# Altium PCB PDB_Layout_2oz_v1.0.PcbDoc
Units mil, origin at the board's own origin, x right, y up, seen from the top; angles counter-clockwise.
Board outline 6000 x 4000 mil, 2 copper layers (Top Layer, Bottom Layer); 33 components, 25 nets, 102 pads, 0 vias.
Unrouted connection lines stored in the file: 75.
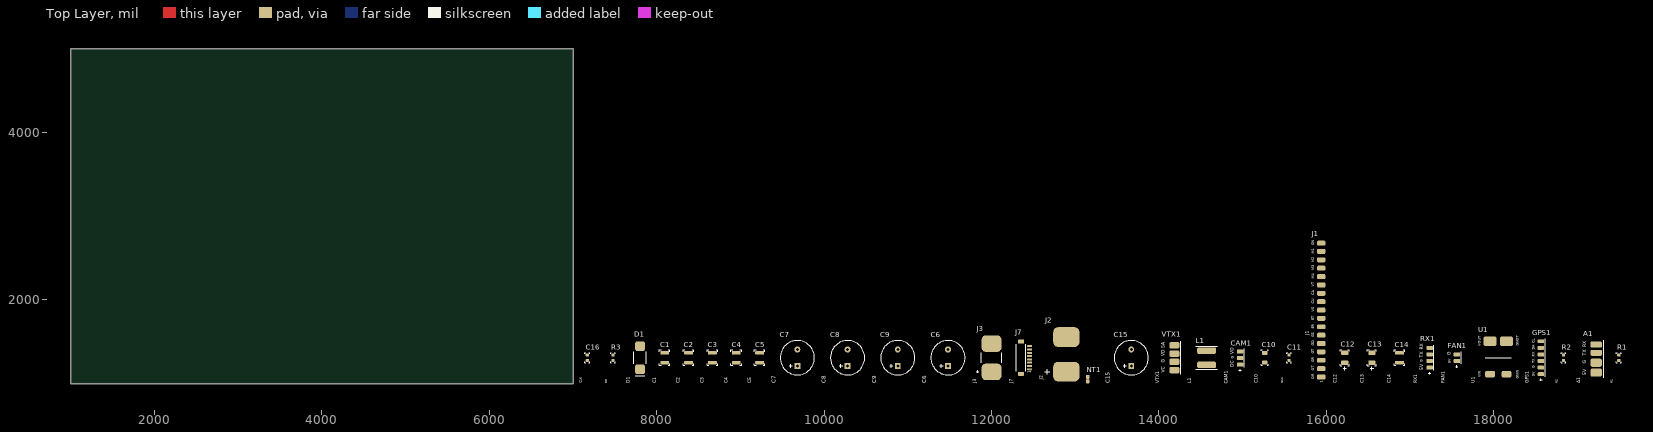
[diagram p0: Top Layer view]
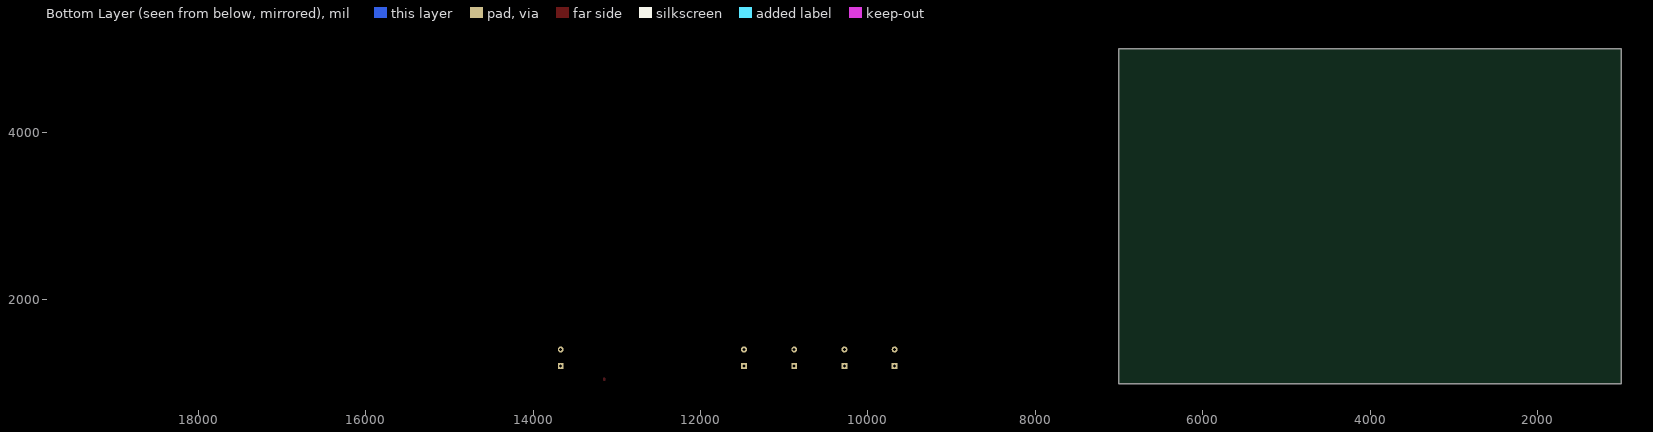
[diagram p1: Bottom Layer view, seen from below]

## Layer stack, top to bottom
Top Solder: solder mask 0.4, Solder Resist, Dk 3.5
Top Layer: signal copper 1.4
Dielectric 1: dielectric 12.6, FR-4, Dk 4.8
Bottom Layer: signal copper 1.4
Bottom Solder: solder mask 0.4, Solder Resist, Dk 3.5

## Board outline
1000,1000 7000,1000 7000,5000 1000,5000

## Design rules (kind name [scope] priority, off if disabled: settings)
Clearance [All] p1: gap=10 ignorepadtopadclearanceinfootprint=FALSE
PolygonConnect [All] p1: connectstyle=Relief reliefconductorwidth=10 reliefentries=4 polygonreliefangle="90 Angle" airgapwidth=10
RoutingVias [All] p1: holewidth=28 width=50 viastyle="Through Hole" minholewidth=28 minwidth=50 maxholewidth=28 maxwidth=50
SolderMaskExpansion [All] p1: expansion=4 istentingtop=FALSE
SupplyNets "Schematic Supply Nets" [InNet('GND')] p1: voltage=0.000
Width [All] p1: maxlimit=10 minlimit=10 preferedwidth=10
30 further rules are at their usual default settings.

## Components (designator, comment, footprint, x,y, rotation, side; value= is the part's Value field where it differs from the comment)
A1 "Orange Pi 5 Pro" FOOTPRINT_ORANGE_PI 19225,1310 r90 top
C1 "22uF 50V" 1210 8095,1310 r90 top
C2 "22uF 50V" 1210 8380,1310 r90 top
C3 "22uF 50V" 1210 8665,1310 r90 top
C4 "22uF 50V" 1210 8950,1310 r90 top
C5 "22uF 50V" 1210 9230,1310 r90 top
C6 "390uF 35V" CAP_ELEC_D10.0_P5.0 11480,1310 r90 top value=390uF
C7 "390uF 35V" CAP_ELEC_D10.0_P5.0 9680,1310 r90 top value=390uF
C8 "390uF 35V" CAP_ELEC_D10.0_P5.0 10280,1310 r90 top value=390uF
C9 "390uF 35V" CAP_ELEC_D10.0_P5.0 10880,1310 r90 top value=390uF
C10 "10uF 50V" 1206 15265,1310 r90 top
C11 "100nF 50V" 0603 15555,1310 r90 top
C12 "47uF 10V" CAP_TANT_3528 16220,1310 r90 top
C13 "47uF 10V" CAP_TANT_3528 16545,1310 r90 top
C14 "22uF 50V" 1210 16875,1310 r90 top
C15 "220uF 50V" CAP_ELEC_D10.0_P5.0 13670,1310 r90 top
C16 "2.2uF 16V" 0603 7170,1310 r90 top
CAM1 "Caddx Ratel 2" FOOTPRINT_Caddx_Ratel_2 14970,1345 r90 top
D1 "SMCJ26A" DIODE_SMC 7800,1310 r90 top
FAN1 "Cooling_Fan" FOOTPRINT_FAN_5V 17560,1310 r90 top
GPS1 "Beitian M10" FOOTPRINT_BEITIAN_M10 18565,1310 r90 top
J1 "TO SPEEDYBEE FC" SpeedyBee_FC 15940,1880 r90 top
J2 "XT90-S" XT90-S_PWR 12895,1350 r90 top
J3 "ESC_POWER" PADS_ESC_PWR 12000,1310 r90 top
J7 "FC_ESC_LINK" CONN_JST_SH_BM08B-SRSS-TB_8P 12385,1310 r90 top
L1 "33uH / 1.5A" FOOTPRINT_INDUCTOR_SRN6045 14570,1310 r90 top value=33uH
NT1 "GND_Tie" NET_TIE_0.2MM 13150,1055 r90 top net-tie
R1 "47 Ohm 1% 0603" 0603 19495,1310 r90 top
R2 "47 Ohm 1% 0603" 0603 18835,1310 r90 top
R3 "100 Ohm 1% 0603" 0603 7475,1310 r90 top
RX1 "ELRS Receiver" FOOTPRINT_ELRS_RX 17235,1310 r90 top
U1 "Hobbywing UBEC 5A" UBEC_Hobbywing_5A 18055,1310 r90 top
VTX1 "Rush Tank Solo" FOOTPRINT_VTX_RUSH_SOLO 14185,1310 r90 top

## Footprints (in the part's own frame and the unit in brackets; to place one, negate y for a bottom-side part, rotate by r counter-clockwise, add the part's x,y. Pads: shape width x height; smd on the part's side, far side on the other; paste and mask are expansions set on the pad)
0603 [mm] "CAPC1608X90N"
  rrect50% 0.9x0.95 smd: 1(-0.8,0) 2(0.8,0)
  silkscreen extent -1.5,-0.7 1.5,0.7
1206 [mm] "CAPC3216X180N"
  rrect50% 1.2x1.7 smd: 1(-1.5,0) 2(1.5,0)
  silkscreen extent -2.35,-1.05 2.35,1.05
1210 [mm] "CAPC3225X280N"
  rrect50% 1.1x2.7 smd: 1(-1.5,0) 2(1.5,0)
  silkscreen extent -2.35,-1.6 2.35,1.6
CAP_ELEC_D10.0_P5.0 [mm] "CAPRB500W60D1000H1600"
  rect 1.8x1.8 hole 0.9: 1(-2.5,0)
  round 1.8 hole 0.9: 2(2.5,0)
  silkscreen extent -5.2,-5.2 5.2,5.2
CAP_TANT_3528 [mm] "CAPMP3528X210N"
  rrect50% 1.4x2.2 smd: 1(-1.5,0) 2(1.5,0)
  silkscreen extent -3.72,-1.39 2.45,1.35
CONN_JST_SH_BM08B-SRSS-TB_8P [mm]
  rrect50% 0.6x1.55 smd: 1(-3.5,-1.8) 2(-2.5,-1.8) 3(-1.5,-1.8) 4(-0.5,-1.8) 5(0.5,-1.8) 6(1.5,-1.8) 7(2.5,-1.8) 8(3.5,-1.8)
  rrect50% 1.2x1.9 smd: 9(-4.9,0.8) 10(4.9,0.8)
  silkscreen extent -4.1,-0.65 4.1,2.25
DIODE_SMC [mm]
  rrect50% 3x3 smd: 1(-3.5,0) 2(3.5,0)
  silkscreen extent -5.4,-1.9 1.8,1.9
FOOTPRINT_BEITIAN_M10 [mm]
  rrect50% 1.2x2 smd: 1(-5,0) 2(-3,0) 3(-1,0) 4(1,0) 5(3,0) 6(5,0)
  silkscreen extent -7.05,-1.3 5.75,0.35
FOOTPRINT_Caddx_Ratel_2 [mm]
  rrect50% 1.2x2 smd: 1(-3,0) 2(-1,0) 3(1,0)
  silkscreen extent -5.05,-1.3 1.8,0.35
FOOTPRINT_ELRS_RX [mm]
  rrect50% 1.2x2 smd: 1(-3,0) 2(-1,0) 3(1,0) 4(3,0)
  silkscreen extent -5.05,-1.3 3.8,0.35
FOOTPRINT_FAN_5V [mm]
  rrect50% 1.2x2 smd: 1(-1,0) 2(1,0)
  silkscreen extent -3.05,-1.3 1.8,0.35
FOOTPRINT_INDUCTOR_SRN6045 [mm]
  rrect50% 2x5.7 smd: 1(-2.15,0) 2(2.15,0)
  silkscreen extent -3.5,-3.25 3.5,3.25
FOOTPRINT_ORANGE_PI [mm]
  rrect50% 2.5x3.5 smd: 1(-4.5,0) 2(-1.5,0)
  rrect50% 1.8x3.5 smd: 3(1.5,0) 4(4,0)
  silkscreen extent -6,-2.25 5.25,-2.25
FOOTPRINT_VTX_RUSH_SOLO [mm]
  rrect50% 2x3 smd: 1(-3.75,0) 2(-1.25,0) 3(1.25,0) 4(3.75,0)
  silkscreen extent -5,-2 5,-2
NET_TIE_0.2MM [mm]
  rrect50% 1.2x1.2 smd mask+0.102: 1(-0.7,0) 2(0.7,0)
  Top Layer lines w0.8: -0.15,0 0.15,0
PADS_ESC_PWR [mm]
  rrect50% 5x6 smd: 1(-4.3,0) 2(4.3,0)
  silkscreen extent -4.6,-3.1 1.5,4.6
SpeedyBee_FC [mm]
  rrect50% 1.5x2.5 smd: 1(-20.32,0) 2(-17.78,0) 3(-15.24,0) 4(-12.7,0) 5(-10.16,0) 6(-7.62,0) 7(-5.08,0) 8(-2.54,0) 9(0,0) 10(2.54,0) 11(5.08,0) 12(7.62,0) 13(10.16,0) 14(12.7,0) 15(15.24,0) 16(17.78,0) 17(20.32,0)
UBEC_Hobbywing_5A [mm]
  rrect50% 2x3 smd: 1(-5,2.5) 3(-5,-2.5)
  rrect50% 3x4 smd: 2(5,2.5) 4(5,-2.5)
  silkscreen extent 0,-4 0,4
XT90-S_PWR [mm]
  rrect50% 6x8 smd: 1(-5.25,0) 2(5.25,0)
  silkscreen extent -6,5.05 -4.5,6.55

## Part data
C1 C2 C3 C4 C5: library part Cap_MLCC, "Multilayer Ceramic Capacitor (MLCC), 22uF 50V, X7R, 1210 (3225 Metric), High-Frequency ESC Filter. GRM32ER71H226ME14L"
C6 C7 C8 C9: library part Cap_Low_ESR, "Low ESR Aluminum Electrolytic Capacitor, Panasonic FR Series, 390uF 35V, Radial, 5mm Lead Pitc", Manufacturer=Panasonic, Part Number=EEU-FR1V391L, Voltage=35V
C10: library part Cap_Cer_10uF_50V_1206, "Ceramic Capacitor, 10 uF, 50 V, X7R Dielectric, 1206 SMD, UBEC VIN Buffer"
C11: library part Cap_Cer_100nF_50V_0603, "High-Frequency Ceramic Capacitor, 100 nF, 50 V, X7R Dielectric, 0603 SMD, UBEC VIN Decoupling"
C12 C13: library part Cap_Tantal_3528, "Polymer Tantalum Capacitor, 47uF, 10V, ±20%, 35 mOhm ESR, SMD 3528-21 (EIA 1210)", MPN=T520B476M010ATE035
C14: library part Cap_MLCC, "Multilayer Ceramic Capacitor (MLCC), 22uF 50V, X7R, 1210 (3225 Metric), High-Frequency ESC Filter"
C15: library part Cap_Low_ESR_220uF_50V, "Low-ESR Aluminum Electrolytic Capacitor, 220 uF, 50 V, Radial, LC Video Filter"
C16: library part Cap_Cer_2.2uF_16V_0603, "Ceramic Capacitor, 2.2 uF, 16 V, X7R Dielectric, 0603 SMD, ESC Current Sensor Filter"
CAM1: "Analog FPV Micro Camera, 1200TVL, Ultra Low Light Starlight"
D1: "Transient Voltage Suppressor (TVS) Diode, Unidirectional, 26V Vrwm, 1500W Peak, DO-214AB (SMC)"
FAN1: library part "Cooling Fan 5V", "V DC Micro Cooling Fan, 25x25x10mm Active Cooling"
GPS1: "GNSS GPS + Compass Module, M10 Platform, UART & I2C Interface"
J1: library part "SpeedyBee FC Signals", "15-Pin Signal Interface Hub for Flight Controller (OPi, GPS, ELRS, VTX, GND)"
J2: "High-Current DC Power Connector with Integrated Anti-Spark Resistance, Amass XT90-S, 90A Peak"
J3: library part PADS_WIRE_1X2, "Wire-to-Board Solder Pads Array, 1x2, 2.54mm Pitch"
J7: library part "JST-SH 8-pin"
L1: library part Inductor_SMD, "Semi-Shielded Power Inductor, Bourns SRN6045 Series, 33uH 2.5A, 0.15 Ohm DCR, LC Video Filter", Current=2.5A, Manufacturer=Bourns, Manufacturer Part Number=SRN6045-330M, Package="6045 SMD", DCR="0.15 Ohm"
NT1: library part NET_TIE, "Net-Tie zero-ohm bridge for ground separation"
R1 R2: library part Res_SMD, "Thick Film Chip Resistor, Yageo RC Series, 47 Ohm 1%, 0.1W (100mW), 0603 (1608 Metric), UART Protection", Manufacturer=Yageo, Part Number=RC0603FR-0747RL
R3: library part Res_100Ohm_0603, "Resistor, 100 Ohm, 1%, 1/10W, 0603 SMD, ESC Current Sensor Filter"
RX1: library part "ExpressLRS RX", "ExpressLRS 2.4GHz True Diversity Radio Receiver Module"
U1: library part UBEC_Hobbywing_5A, "External Step-Down Switching Voltage Regulator Module, Hobbywing UBEC 5A, 2-6S LiPo Input, 5V/6V Selectable Output", Continuous Current=5A, Input Voltage="2-8S LiPo (5.5V - 33.6V)", Manufacturer=Hobbywing, Output Voltage="5.0V / 6.0V / 7.4V", Part Number=HW30607000, Peak Current=15A, Type="Step-Down (Buck) DC-DC"
VTX1: library part "Rush Tank Solo 1.6W", "5.8GHz VTX 1.6W Video Transmitter Module"

## Nets (pads, with @x,y where several pads share a name; then routed paths per layer and width w, separated by ;. In a path a pad name is that pad's centre, name@x,y a point inside that pad or via, vN(x,y) a via of type N, cw(c..) or ccw(c..) an arc to the next point about the centre after c; other vN are vias at no path point)
5V_Logic: A1.1 C12.1 C13.1 C14.2 FAN1.1 GPS1.1 RX1.1 U1.3
ESC_CURR: J7.7 R3.1
GND: A1.2 C1.1 C2.1 C3.1 C4.1 C5.1 C6.2 C7.2 C8.2 C9.2 C10.1 C11.1 C12.2 C13.2 C14.1 C16.1 D1.2 FAN1.2 GPS1.2 J1.17 J2.2 J3.2 J7.1 J7.9 J7.10 RX1.2 U1.2 U1.4
M1: J1.16 J7.6
M2: J1.15 J7.5
M3: J1.14 J7.4
M4: J1.13 J7.3
NetA1_3: A1.3 R1.1
NetA1_4: A1.4 R2.1
NetC15_1: C15.1 CAM1.1 L1.2 VTX1.1
NetC16_2: C16.2 J1.10 R3.2
NetCAM1_3: CAM1.3 J1.11
NetGPS1_3: GPS1.3 J1.3
NetGPS1_4: GPS1.4 J1.4
NetGPS1_5: GPS1.5 J1.5
NetGPS1_6: GPS1.6 J1.6
NetJ1_1: J1.1 R1.2
NetJ1_2: J1.2 R2.2
NetJ1_7: J1.7 RX1.3
NetJ1_8: J1.8 RX1.4
NetJ1_9: J1.9 VTX1.3
NetJ1_12: J1.12 VTX1.4
NoERC: J7.8
VBAT: C1.2 C2.2 C3.2 C4.2 C5.2 C6.1 C7.1 C8.1 C9.1 C10.2 C11.2 D1.1 J2.1 J3.1 J7.2 L1.1 U1.1
Video_GND: C15.2 CAM1.2 VTX1.2
pads on no net: NT1.1 NT1.2

## Text inside footprints (layer, text, board x,y; h text height)
A1: Top Overlay "5V" at 19106.89,1100.35 h39.37 r90; Top Overlay "RX" at 19107.87,1435 h39.37 r90; Top Overlay "TX" at 19107.87,1336.57 h39.37 r90; Top Overlay "G" at 19107.87,1238.15 h39.37 r90
CAM1: Top Overlay "G" at 14895.2,1295.79 h31.5 r90; Top Overlay "VO" at 14895.2,1351.89 h39.37 r90; Top Overlay "DC" at 14895.2,1196.38 h39.37 r90
FAN1: Top Overlay "5V" at 17485.2,1245.04 h31.5 r90; Top Overlay "G" at 17485.2,1337.56 h39.37 r90
GPS1: Top Overlay "RX" at 18490.2,1323.78 h31.5 r90; Top Overlay "DA" at 18490.2,1402.52 h31.5 r90; Top Overlay "CL" at 18490.2,1481.26 h31.5 r90; Top Overlay "TX" at 18490.2,1245.04 h31.5 r90; Top Overlay "G" at 18490.2,1182.05 h31.5 r90; Top Overlay "5V" at 18489.8,1087.56 h31.5 r90
J1: Top Overlay "1" at 15955.94,1009.13 h31.5 r90; Top Overlay "OT" at 15853.58,1154.41 h31.5 r90; Top Overlay "GR" at 15853.58,1254.8 h31.5 r90; Top Overlay "OR" at 15853.58,1054.02 h31.5 r90; Top Overlay "GT" at 15853.58,1355.2 h31.5 r90; Top Overlay "GD" at 15853.58,1455.59 h31.5 r90; Top Overlay "GS" at 15853.58,1555.98 h31.5 r90; Top Overlay "ER" at 15853.58,1656.38 h31.5 r90; Top Overlay "ET" at 15853.58,1756.77 h31.5 r90; Top Overlay "VS" at 15853.58,1857.17 h31.5 r90; Top Overlay "CU" at 15853.58,1957.56 h31.5 r90; Top Overlay "CA" at 15853.58,2055.98 h31.5 r90; Top Overlay "VT" at 15853.58,2156.38 h31.5 r90; Top Overlay "M4" at 15853.58,2256.77 h31.5 r90; Top Overlay "M3" at 15853.58,2353.23 h31.5 r90; Top Overlay "M2" at 15853.58,2453.62 h31.5 r90; Top Overlay "M1" at 15853.58,2554.41 h31.5 r90; Top Overlay "GN" at 15855.55,2653.43 h31.5 r90
J7: Top Overlay "1" at 12475.55,1126.93 h39.37 r90
RX1: Top Overlay "5V" at 17160.2,1161.38 h39.37 r90; Top Overlay "RX" at 17160.2,1404.49 h39.37 r90; Top Overlay "TX" at 17160.2,1310 h39.37 r90; Top Overlay "G" at 17154.29,1257.83 h31.5 r90
U1: Top Overlay "VIN" at 17843.58,1074.57 h31.5 r90; Top Overlay "VOUT" at 17843.58,1449.57 h31.5 r90; Top Overlay "GNIN" at 18299.29,1057.83 h31.5 r90; Top Overlay "GNOT" at 18299.29,1452.52 h31.5 r90
VTX1: Top Overlay "G" at 14072.8,1247.99 h39.37 r90; Top Overlay "VD" at 14072.8,1326.73 h39.37 r90; Top Overlay "SA" at 14071.81,1425.16 h39.37 r90; Top Overlay "VC" at 14072.8,1129.88 h39.37 r90